# Altium PCB holder.PcbDoc
Units mm, origin at the board's own origin, x right, y up, seen from the top; angles counter-clockwise.
Board outline 92.4 x 92.4 mm, 2 copper layers (Top Layer, Bottom Layer); 1 components, 0 nets, 44 pads, 0 vias.
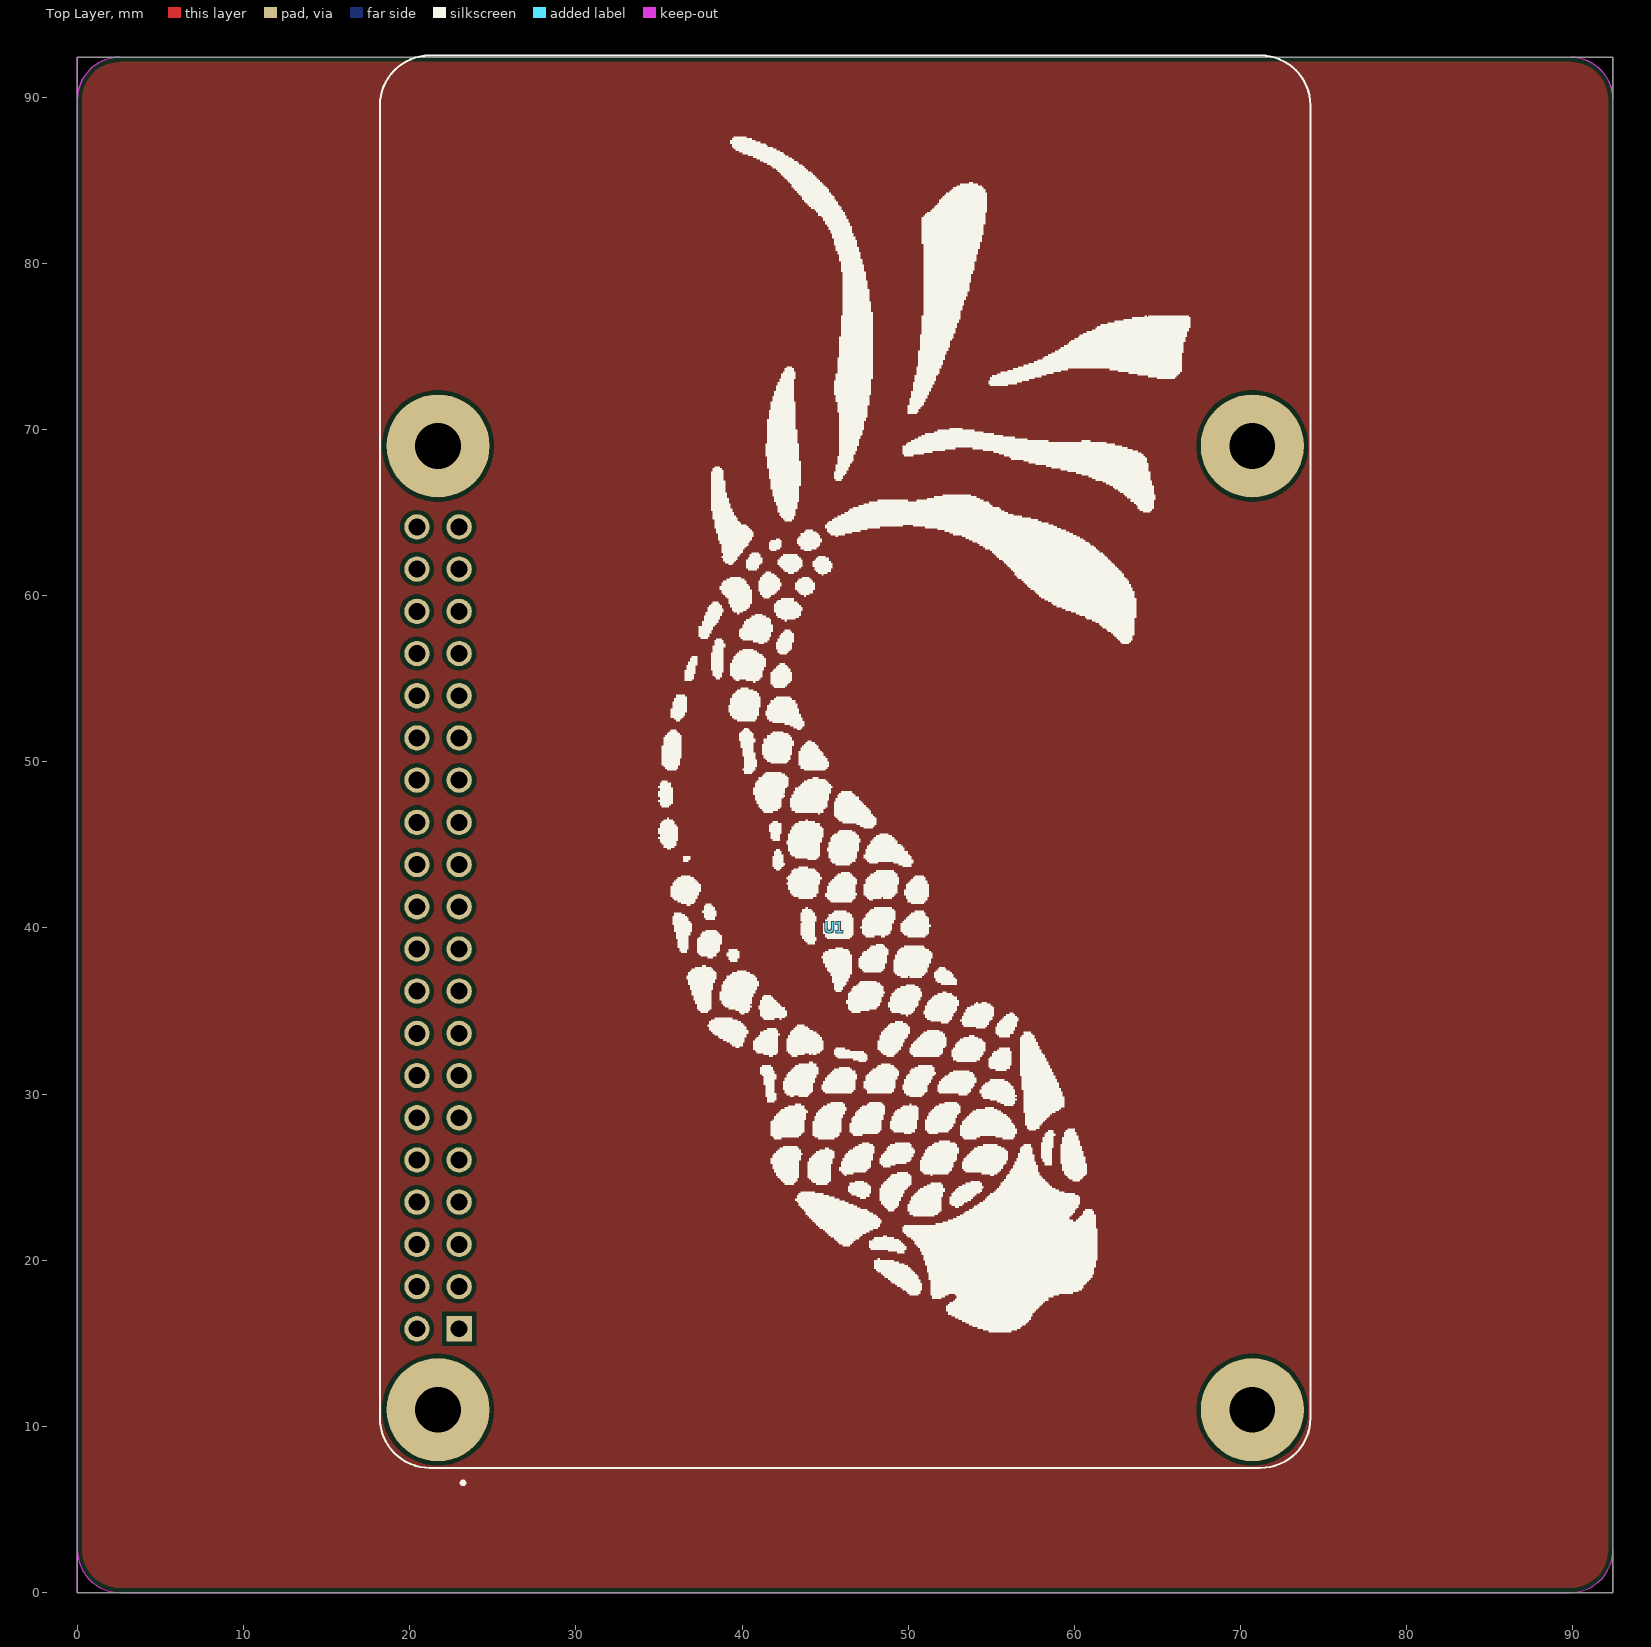
[diagram p0: Top Layer view]
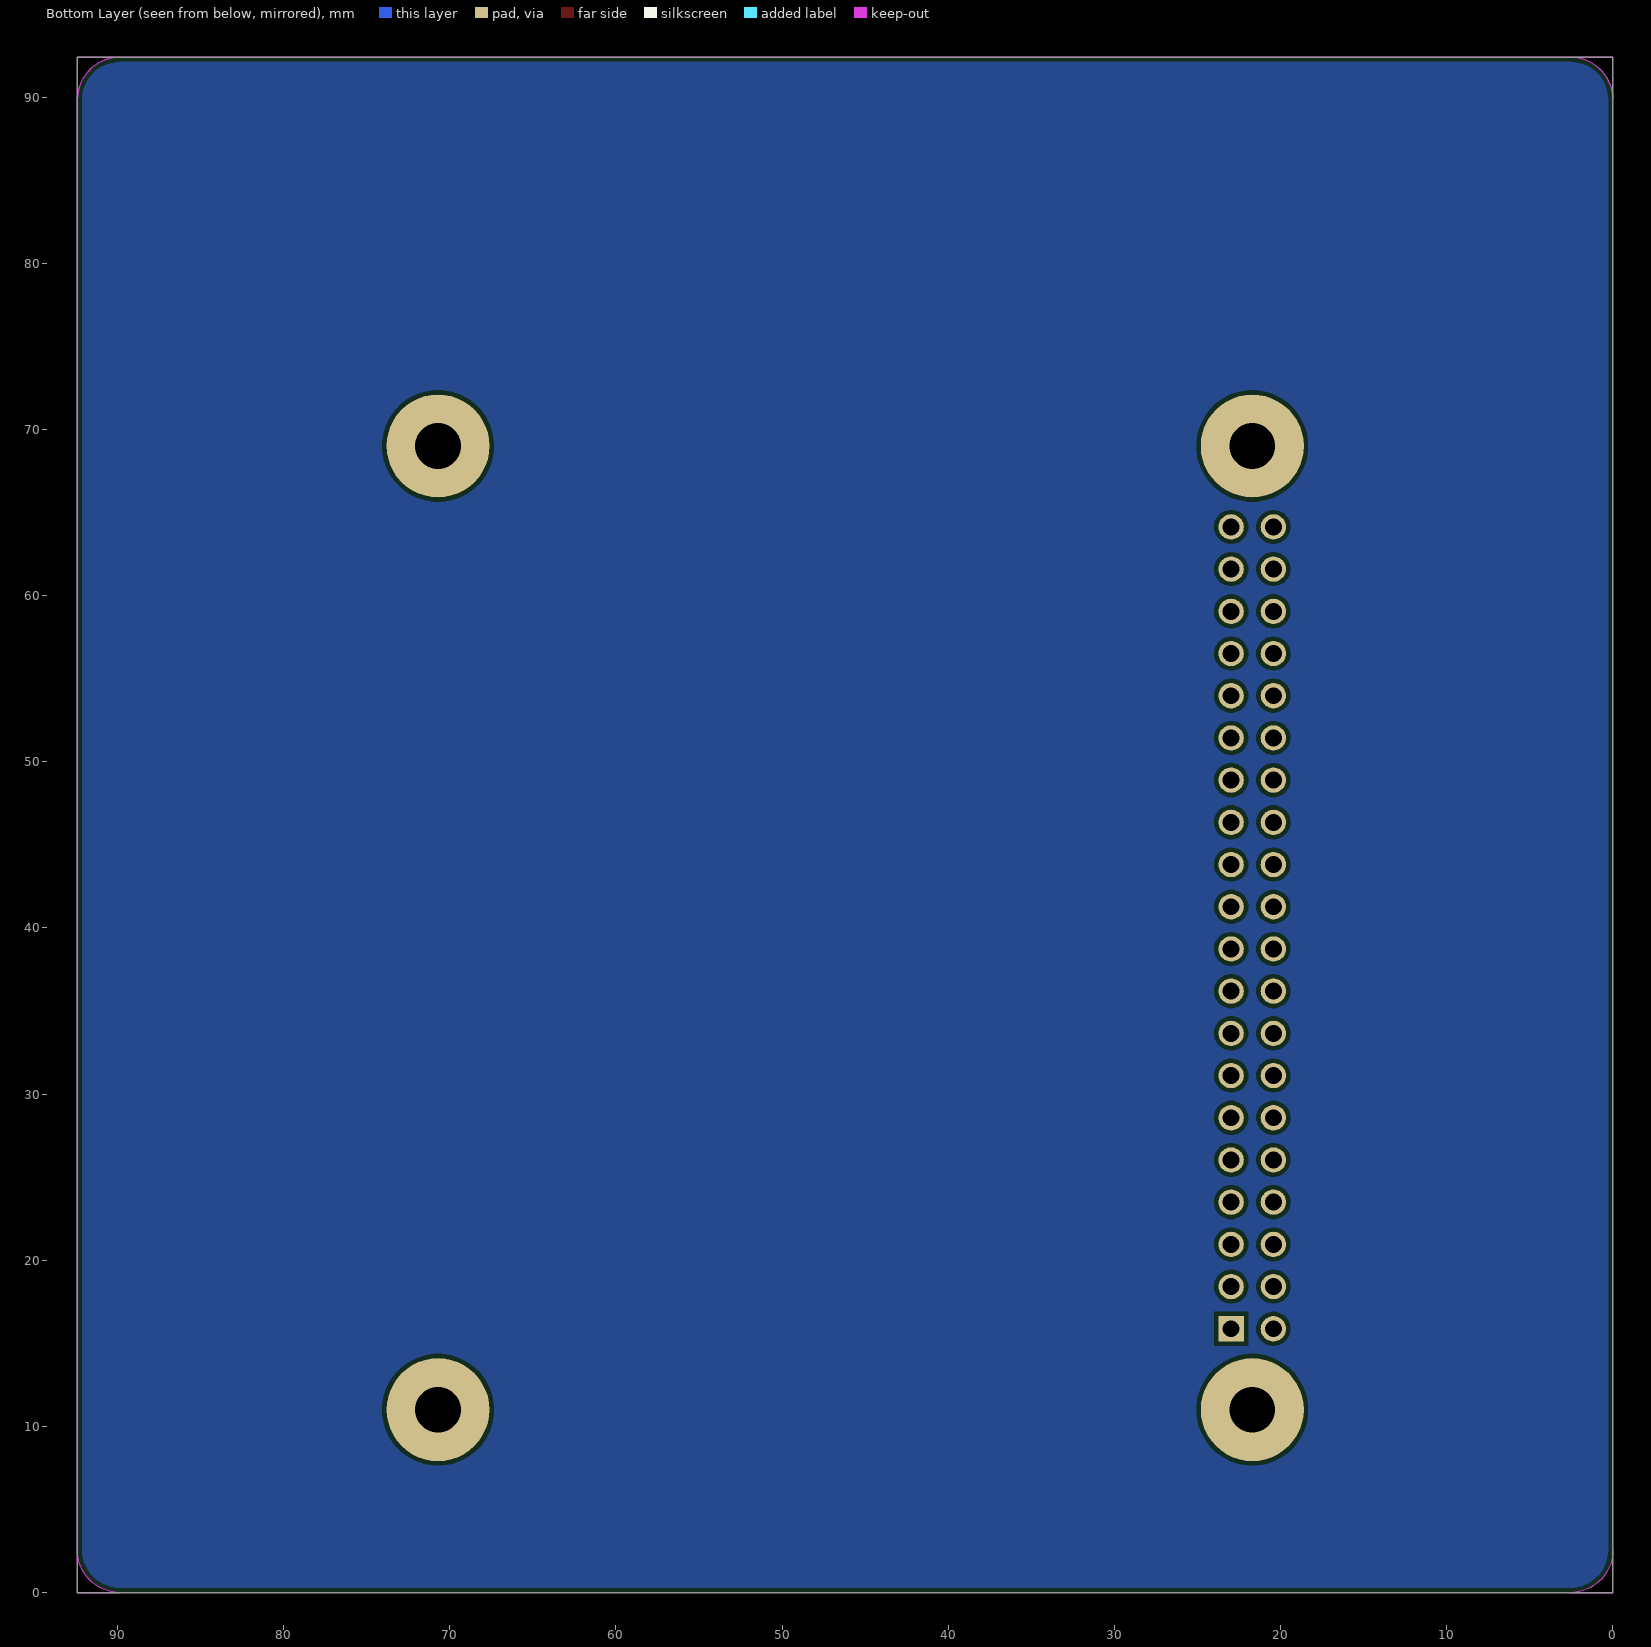
[diagram p1: Bottom Layer view, seen from below]

## Layer stack, top to bottom
Top Solder: solder mask 0.0102, Solder Resist, Dk 3.5
Top Layer: signal copper 0.0356
Dielectric 1: dielectric 0.32, FR-4, Dk 4.8
Bottom Layer: signal copper 0.0356
Bottom Solder: solder mask 0.0102, Solder Resist, Dk 3.5

## Board outline
0,0 92.4,0 92.4,92.4 0,92.4
cut-out: 89.86,0 ccw(c89.86,2.54) 92.4,2.54 92.4,0
cut-out: 0,2.54 ccw(c2.54,2.54) 2.54,0 0,0
cut-out: 92.4,89.86 ccw(c89.86,89.86) 89.86,92.4 92.4,92.4
cut-out: 2.54,92.4 ccw(c2.54,89.86) 0,89.86 0,92.4

## Design rules (kind name [scope] priority, off if disabled: settings)
Clearance [All] p1: gap=0.254 ignorepadtopadclearanceinfootprint=FALSE except(0: Arc-Hole Track-Hole SMDPad-Hole THPad-Hole Via-Hole Fill-Hole Poly-Hole Region-Hole Text-Hole)
PolygonConnect [All] p1: connectstyle=Relief reliefconductorwidth=0.254 reliefentries=4 polygonreliefangle="90 Angle" airgapwidth=0.254
RoutingVias [All] p1: holewidth=0.711 width=1.27 viastyle="Through Hole" minholewidth=0.711 minwidth=1.27 maxholewidth=0.711 maxwidth=1.27
SolderMaskExpansion [All] p1: expansion=0.102 istentingtop=FALSE
Width [All] p1: maxlimit=0.254 minlimit=0.254 preferedwidth=0.254
30 further rules are at their usual default settings.

## Components (designator, comment, footprint, x,y, rotation, side; value= is the part's Value field where it differs from the comment)
U1 "RASPBERRY_PI_3_MODEL_B+" MODULE_RASPBERRY_PI_3_MODEL_B+ 46.2,50 r90 top

## Footprints (in the part's own frame and the unit in brackets; to place one, negate y for a bottom-side part, rotate by r counter-clockwise, add the part's x,y. Pads: shape width x height; smd on the part's side, far side on the other; paste and mask are expansions set on the pad)
MODULE_RASPBERRY_PI_3_MODEL_B+ [mil]
  rect 60x60 hole 40: 1(-1343.7,914.57)
  round 60 hole 40: 2(-1343.7,1014.57) 3(-1243.7,914.57) 4(-1243.7,1014.57) 5(-1143.7,914.57) 6(-1143.7,1014.57) 7(-1043.7,914.57) 8(-1043.7,1014.57) 9(-943.7,914.57) 10(-943.7,1014.57) 11(-843.7,914.57) 12(-843.7,1014.57) 13(-743.7,914.57) 14(-743.7,1014.57) 15(-643.7,914.57) 16(-643.7,1014.57) 17(-543.7,914.57) 18(-543.7,1014.57) 19(-443.7,914.57) 20(-443.7,1014.57) 21(-343.7,914.57) 22(-343.7,1014.57) 23(-243.7,914.57) 24(-243.7,1014.57) 25(-143.7,914.57) 26(-143.7,1014.57) 27(-43.7,914.57) 28(-43.7,1014.57) 29(56.3,914.57) 30(56.3,1014.57) 31(156.3,914.57) 32(156.3,1014.57) 33(256.3,914.57) 34(256.3,1014.57) 35(356.3,914.57) 36(356.3,1014.57) 37(456.3,914.57) 38(456.3,1014.57) 39(556.3,914.57) 40(556.3,1014.57)
  round 244.09 hole 108.27: S1(-1535.43,964.57) S2(748.03,964.57) S3(748.03,-964.57) S4(-1535.43,-964.57)
  silkscreen extent -1713,-1102 1673,1102

## Part data
U1: "BCM2835 Raspberry Pi Model B+ - ARM11, VideoCore MPU Embedded Evaluation Board", Package=None, Availability=Unavailable, MP=RASPBERRY_PI_3_MODEL_B+, Price=None

## Nets (pads, with @x,y where several pads share a name; then routed paths per layer and width w, separated by ;. In a path a pad name is that pad's centre, name@x,y a point inside that pad or via, vN(x,y) a via of type N, cw(c..) or ccw(c..) an arc to the next point about the centre after c; other vN are vias at no path point)
pads on no net: U1.1 U1.2 U1.3 U1.4 U1.5 U1.6 U1.7 U1.8 U1.9 U1.10 U1.11 U1.12 U1.13 U1.14 U1.15 U1.16 U1.17 U1.18 U1.19 U1.20 U1.21 U1.22 U1.23 U1.24 U1.25 U1.26 U1.27 U1.28 U1.29 U1.30 U1.31 U1.32 U1.33 U1.34 U1.35 U1.36 U1.37 U1.38 U1.39 U1.40 U1.S1 U1.S2 U1.S3 U1.S4

## Polygon pours and split planes (outlines as drawn)
no net on Top Layer "NONET_L01_P001" (solid, pour order 1): 0.02,0 0.02,92.4 92.42,92.4 92.42,0
no net on Bottom Layer "NONET_L02_P000" (solid, pour order 0): 0,0 0,92.4 92.4,92.4 92.4,0

## Keep-outs
Keep-Out Layer:
  lines w0.051: 92.4,2.54 92.388,2.291 92.291,1.803 92.1,1.343 91.823,0.929 91.471,0.577 91.057,0.3 90.597,0.109 90.109,0.012 89.86,0 2.54,0 2.291,0.012 1.803,0.109 1.343,0.3 0.929,0.577 0.577,0.929 0.3,1.343 0.109,1.803 0.012,2.291 0,2.54 0,89.86 0.012,90.109 0.109,90.597 0.3,91.057 0.577,91.471 0.929,91.823 1.343,92.1 1.803,92.291 2.291,92.388 2.54,92.4 89.86,92.4 90.109,92.388 90.597,92.291 91.057,92.1 91.471,91.823 91.823,91.471 92.1,91.057 92.291,90.597 92.388,90.109 92.4,89.86 92.4,2.54 ; 92.4,2.54 92.4,2.54

## Silkscreen, mask and mechanical layers (free items; w line width, h text height)
Top Overlay:
  drawing of 104 lines, arcs and shapes, not listed
Top Solder:
  drawing of 27 lines, arcs and shapes, not listed